# EAGLE board headstage-64-coax-adapter_panel (EAGLE 8.3.2), part 1 of 2
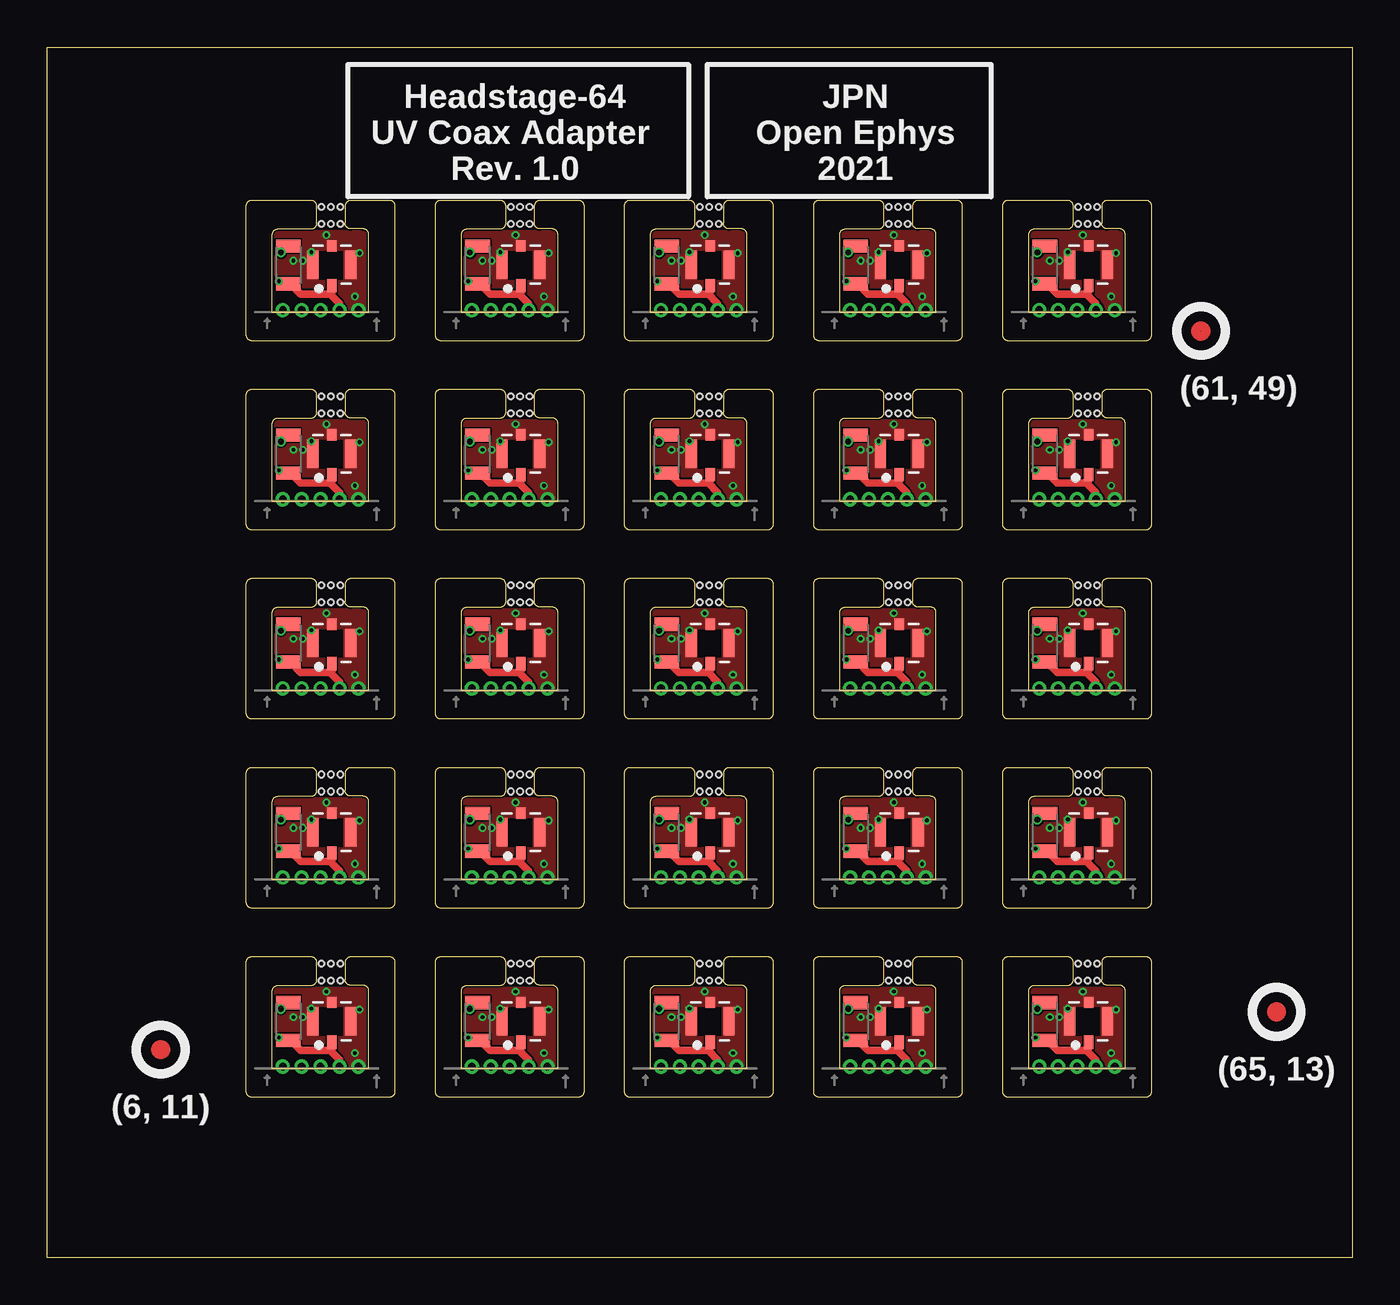
[diagram p0: board, top side]
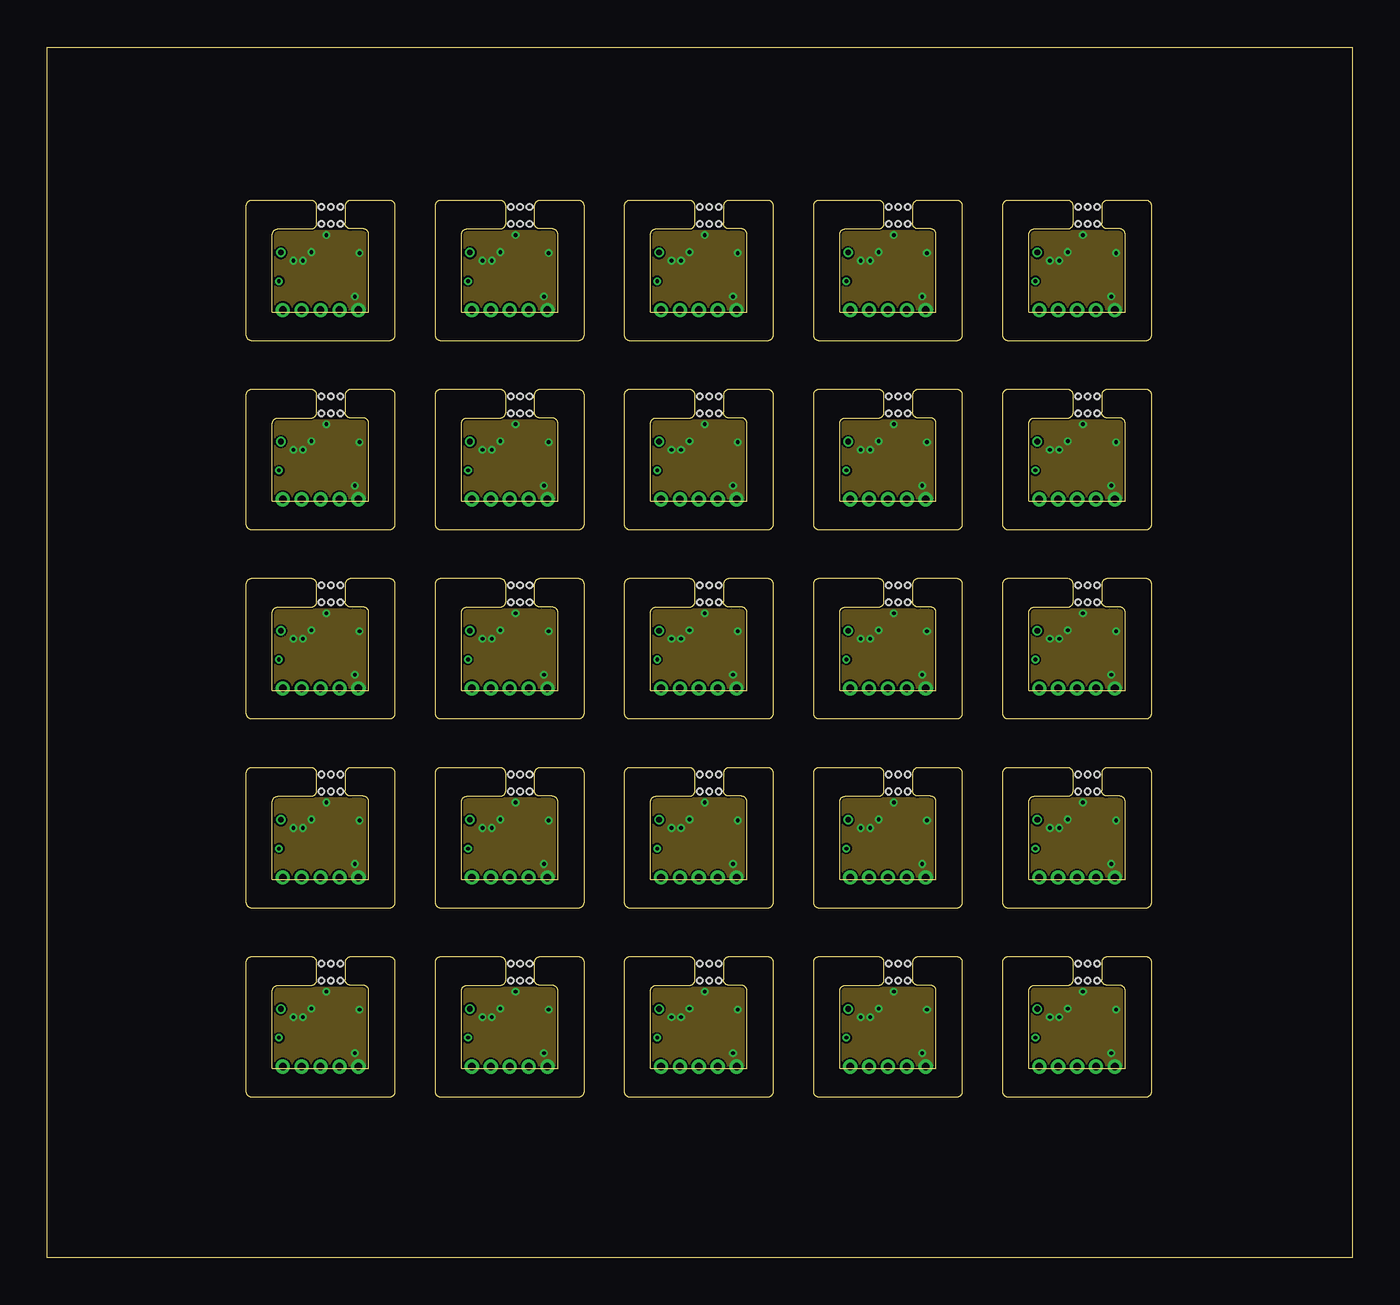
[diagram p1: board, inner layer Route2]
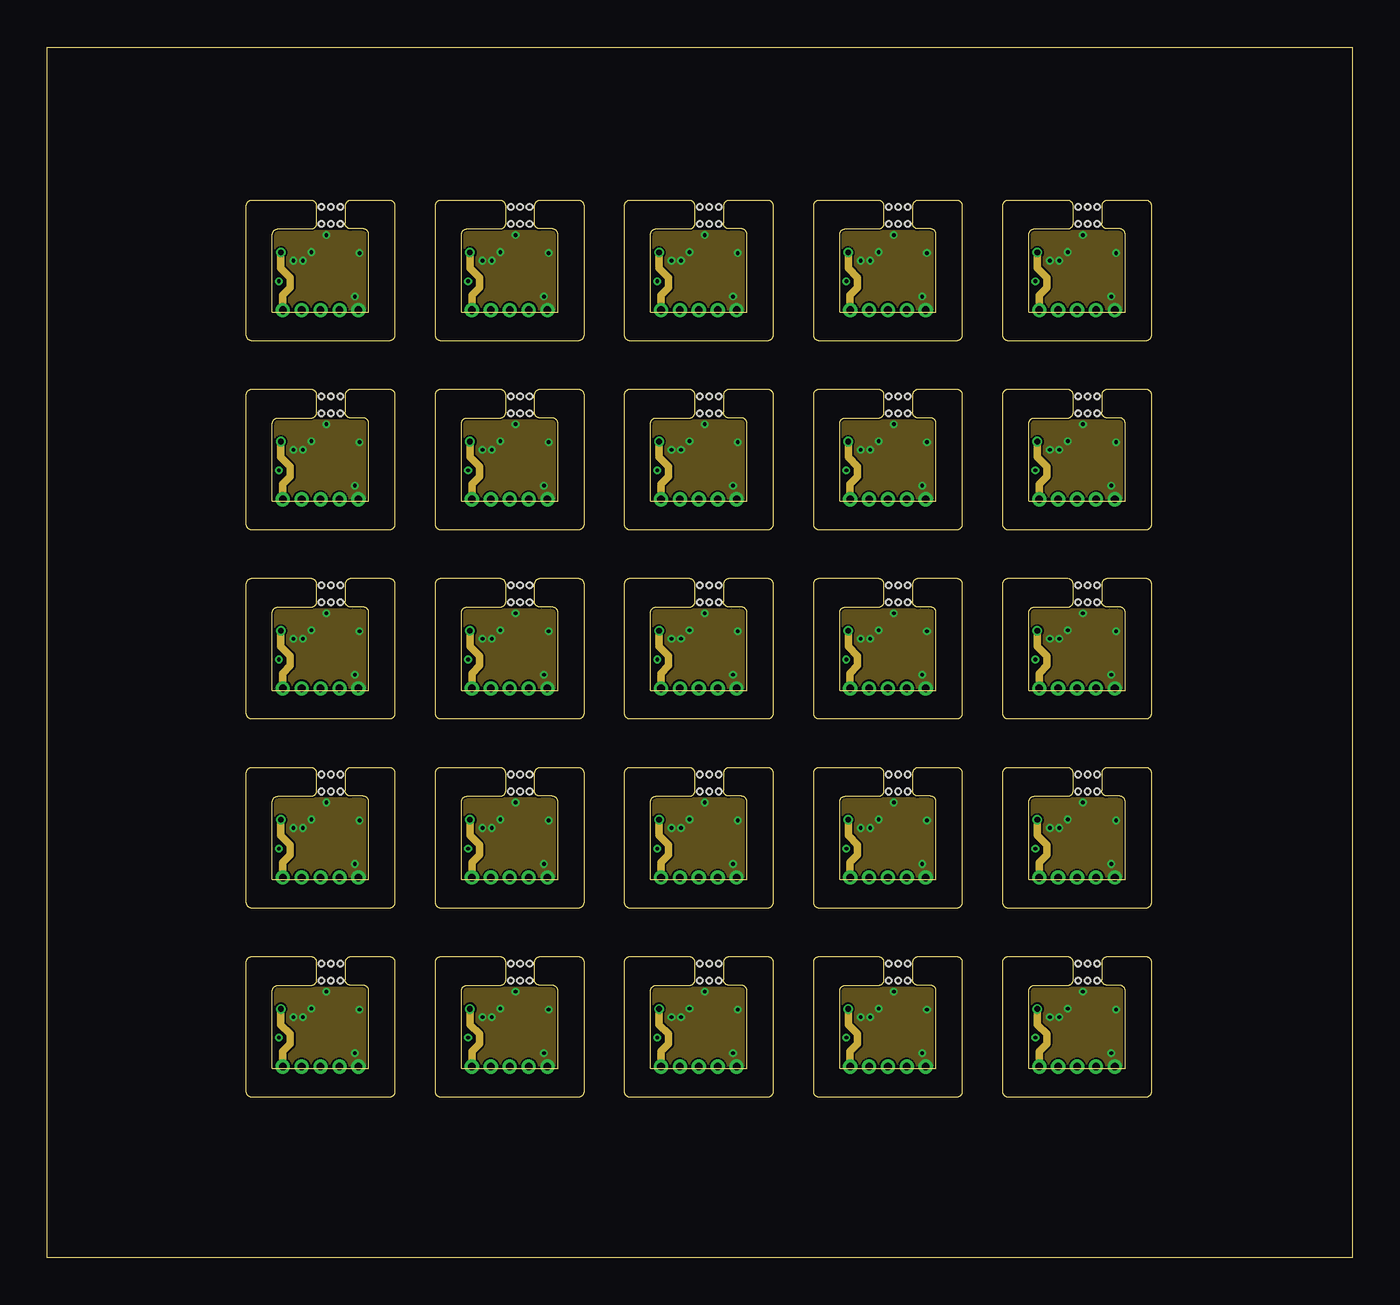
[diagram p2: board, inner layer Route15]
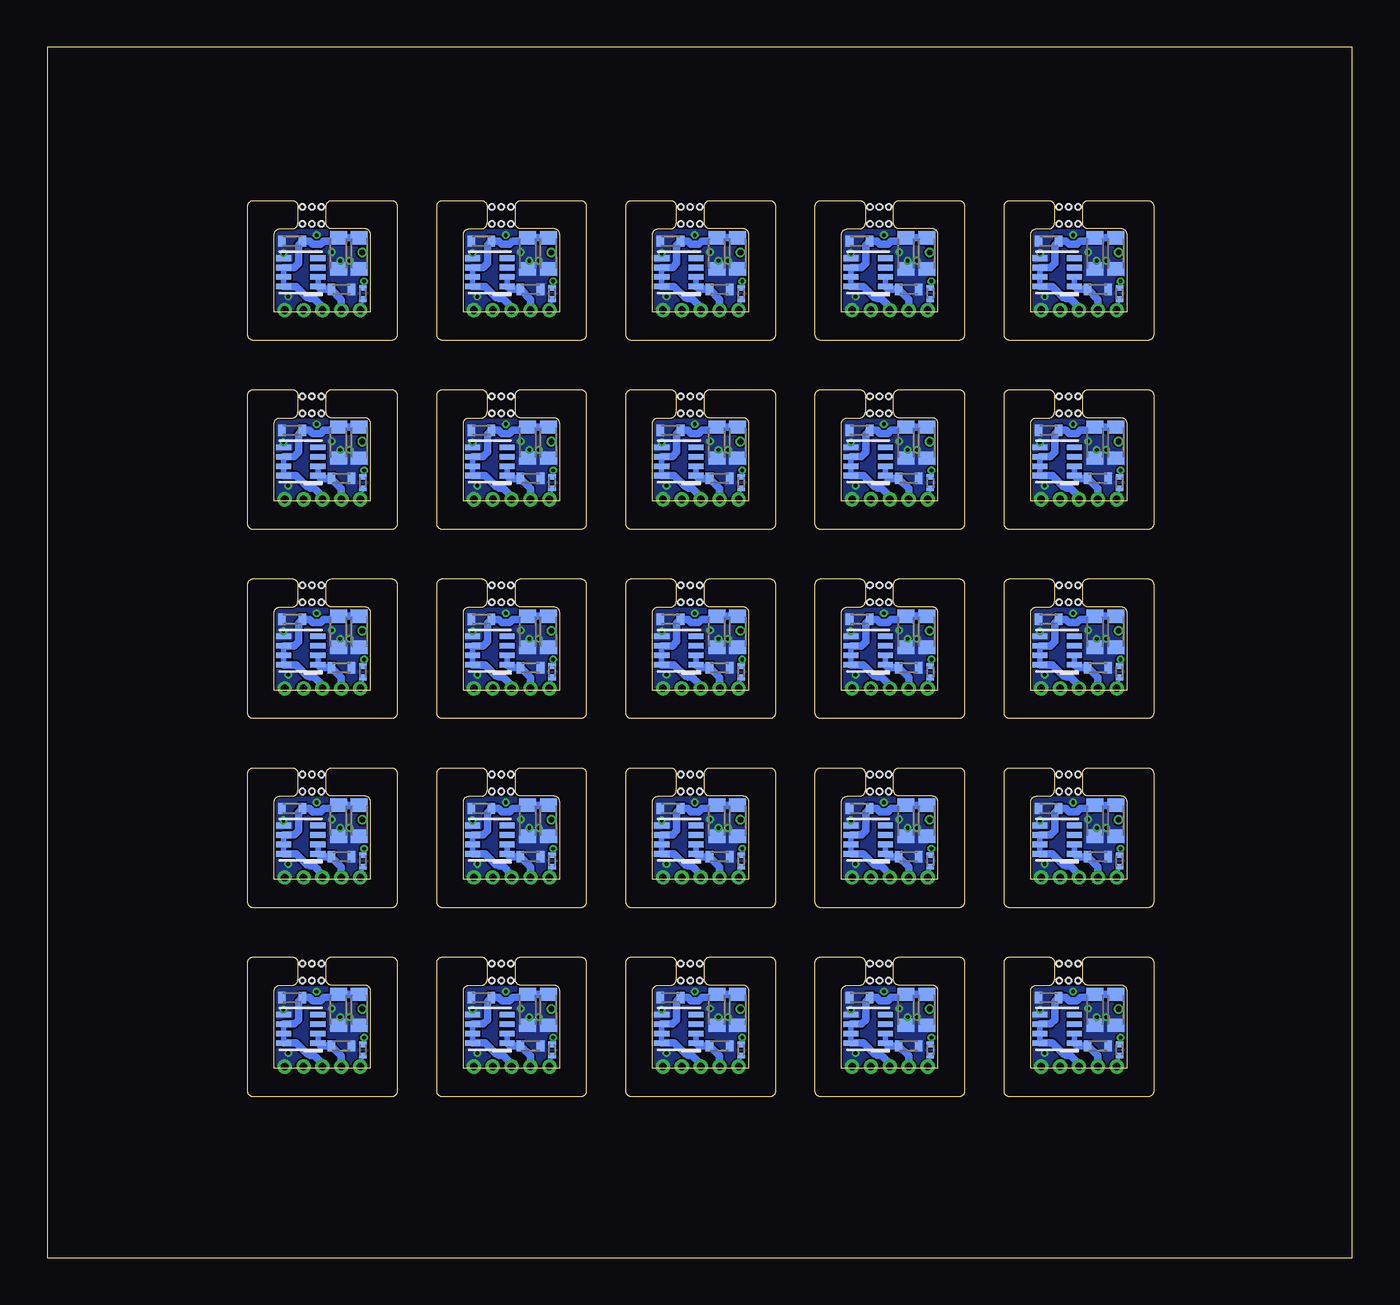
[diagram p3: board, bottom side, seen from below]

Size 69 x 64 mm. Coordinates in mm from the lower left corner, seen from the top.
Outline: 11.9,10 17,10 17,14.1 arc90 16.7,14.4 16.05,14.4 arc-90 15.75,14.7 15.75,15.6 arc-90 16.05,15.9 18.1,15.9 arc-90 18.4,15.6 18.4,8.8 arc-90 18.1,8.5 10.8,8.5 arc-90 10.5,8.8 10.5,15.6 arc-90 10.8,15.9 13.95,15.9 arc-90 14.25,15.6 14.25,14.7 arc-90 13.95,14.4 12.2,14.4 arc90 11.9,14.1 11.9,10
Outline: 0,0 0,64 69,64 69,0 0,0
Outline: 21.9,10 27,10 27,14.1 arc90 26.7,14.4 26.05,14.4 arc-90 25.75,14.7 25.75,15.6 arc-90 26.05,15.9 28.1,15.9 arc-90 28.4,15.6 28.4,8.8 arc-90 28.1,8.5 20.8,8.5 arc-90 20.5,8.8 20.5,15.6 arc-90 20.8,15.9 23.95,15.9 arc-90 24.25,15.6 24.25,14.7 arc-90 23.95,14.4 22.2,14.4 arc90 21.9,14.1 21.9,10
Outline: 31.9,10 37,10 37,14.1 arc90 36.7,14.4 36.05,14.4 arc-90 35.75,14.7 35.75,15.6 arc-90 36.05,15.9 38.1,15.9 arc-90 38.4,15.6 38.4,8.8 arc-90 38.1,8.5 30.8,8.5 arc-90 30.5,8.8 30.5,15.6 arc-90 30.8,15.9 33.95,15.9 arc-90 34.25,15.6 34.25,14.7 arc-90 33.95,14.4 32.2,14.4 arc90 31.9,14.1 31.9,10
Outline: 41.9,10 47,10 47,14.1 arc90 46.7,14.4 46.05,14.4 arc-90 45.75,14.7 45.75,15.6 arc-90 46.05,15.9 48.1,15.9 arc-90 48.4,15.6 48.4,8.8 arc-90 48.1,8.5 40.8,8.5 arc-90 40.5,8.8 40.5,15.6 arc-90 40.8,15.9 43.95,15.9 arc-90 44.25,15.6 44.25,14.7 arc-90 43.95,14.4 42.2,14.4 arc90 41.9,14.1 41.9,10
Outline: 51.9,10 57,10 57,14.1 arc90 56.7,14.4 56.05,14.4 arc-90 55.75,14.7 55.75,15.6 arc-90 56.05,15.9 58.1,15.9 arc-90 58.4,15.6 58.4,8.8 arc-90 58.1,8.5 50.8,8.5 arc-90 50.5,8.8 50.5,15.6 arc-90 50.8,15.9 53.95,15.9 arc-90 54.25,15.6 54.25,14.7 arc-90 53.95,14.4 52.2,14.4 arc90 51.9,14.1 51.9,10
Outline: 11.9,20 17,20 17,24.1 arc90 16.7,24.4 16.05,24.4 arc-90 15.75,24.7 15.75,25.6 arc-90 16.05,25.9 18.1,25.9 arc-90 18.4,25.6 18.4,18.8 arc-90 18.1,18.5 10.8,18.5 arc-90 10.5,18.8 10.5,25.6 arc-90 10.8,25.9 13.95,25.9 arc-90 14.25,25.6 14.25,24.7 arc-90 13.95,24.4 12.2,24.4 arc90 11.9,24.1 11.9,20
Outline: 21.9,20 27,20 27,24.1 arc90 26.7,24.4 26.05,24.4 arc-90 25.75,24.7 25.75,25.6 arc-90 26.05,25.9 28.1,25.9 arc-90 28.4,25.6 28.4,18.8 arc-90 28.1,18.5 20.8,18.5 arc-90 20.5,18.8 20.5,25.6 arc-90 20.8,25.9 23.95,25.9 arc-90 24.25,25.6 24.25,24.7 arc-90 23.95,24.4 22.2,24.4 arc90 21.9,24.1 21.9,20
Outline: 31.9,20 37,20 37,24.1 arc90 36.7,24.4 36.05,24.4 arc-90 35.75,24.7 35.75,25.6 arc-90 36.05,25.9 38.1,25.9 arc-90 38.4,25.6 38.4,18.8 arc-90 38.1,18.5 30.8,18.5 arc-90 30.5,18.8 30.5,25.6 arc-90 30.8,25.9 33.95,25.9 arc-90 34.25,25.6 34.25,24.7 arc-90 33.95,24.4 32.2,24.4 arc90 31.9,24.1 31.9,20
Outline: 41.9,20 47,20 47,24.1 arc90 46.7,24.4 46.05,24.4 arc-90 45.75,24.7 45.75,25.6 arc-90 46.05,25.9 48.1,25.9 arc-90 48.4,25.6 48.4,18.8 arc-90 48.1,18.5 40.8,18.5 arc-90 40.5,18.8 40.5,25.6 arc-90 40.8,25.9 43.95,25.9 arc-90 44.25,25.6 44.25,24.7 arc-90 43.95,24.4 42.2,24.4 arc90 41.9,24.1 41.9,20
Outline: 51.9,20 57,20 57,24.1 arc90 56.7,24.4 56.05,24.4 arc-90 55.75,24.7 55.75,25.6 arc-90 56.05,25.9 58.1,25.9 arc-90 58.4,25.6 58.4,18.8 arc-90 58.1,18.5 50.8,18.5 arc-90 50.5,18.8 50.5,25.6 arc-90 50.8,25.9 53.95,25.9 arc-90 54.25,25.6 54.25,24.7 arc-90 53.95,24.4 52.2,24.4 arc90 51.9,24.1 51.9,20
Outline: 11.9,30 17,30 17,34.1 arc90 16.7,34.4 16.05,34.4 arc-90 15.75,34.7 15.75,35.6 arc-90 16.05,35.9 18.1,35.9 arc-90 18.4,35.6 18.4,28.8 arc-90 18.1,28.5 10.8,28.5 arc-90 10.5,28.8 10.5,35.6 arc-90 10.8,35.9 13.95,35.9 arc-90 14.25,35.6 14.25,34.7 arc-90 13.95,34.4 12.2,34.4 arc90 11.9,34.1 11.9,30
Outline: 21.9,30 27,30 27,34.1 arc90 26.7,34.4 26.05,34.4 arc-90 25.75,34.7 25.75,35.6 arc-90 26.05,35.9 28.1,35.9 arc-90 28.4,35.6 28.4,28.8 arc-90 28.1,28.5 20.8,28.5 arc-90 20.5,28.8 20.5,35.6 arc-90 20.8,35.9 23.95,35.9 arc-90 24.25,35.6 24.25,34.7 arc-90 23.95,34.4 22.2,34.4 arc90 21.9,34.1 21.9,30
Outline: 31.9,30 37,30 37,34.1 arc90 36.7,34.4 36.05,34.4 arc-90 35.75,34.7 35.75,35.6 arc-90 36.05,35.9 38.1,35.9 arc-90 38.4,35.6 38.4,28.8 arc-90 38.1,28.5 30.8,28.5 arc-90 30.5,28.8 30.5,35.6 arc-90 30.8,35.9 33.95,35.9 arc-90 34.25,35.6 34.25,34.7 arc-90 33.95,34.4 32.2,34.4 arc90 31.9,34.1 31.9,30
Outline: 41.9,30 47,30 47,34.1 arc90 46.7,34.4 46.05,34.4 arc-90 45.75,34.7 45.75,35.6 arc-90 46.05,35.9 48.1,35.9 arc-90 48.4,35.6 48.4,28.8 arc-90 48.1,28.5 40.8,28.5 arc-90 40.5,28.8 40.5,35.6 arc-90 40.8,35.9 43.95,35.9 arc-90 44.25,35.6 44.25,34.7 arc-90 43.95,34.4 42.2,34.4 arc90 41.9,34.1 41.9,30
Outline: 51.9,30 57,30 57,34.1 arc90 56.7,34.4 56.05,34.4 arc-90 55.75,34.7 55.75,35.6 arc-90 56.05,35.9 58.1,35.9 arc-90 58.4,35.6 58.4,28.8 arc-90 58.1,28.5 50.8,28.5 arc-90 50.5,28.8 50.5,35.6 arc-90 50.8,35.9 53.95,35.9 arc-90 54.25,35.6 54.25,34.7 arc-90 53.95,34.4 52.2,34.4 arc90 51.9,34.1 51.9,30
Outline: 11.9,40 17,40 17,44.1 arc90 16.7,44.4 16.05,44.4 arc-90 15.75,44.7 15.75,45.6 arc-90 16.05,45.9 18.1,45.9 arc-90 18.4,45.6 18.4,38.8 arc-90 18.1,38.5 10.8,38.5 arc-90 10.5,38.8 10.5,45.6 arc-90 10.8,45.9 13.95,45.9 arc-90 14.25,45.6 14.25,44.7 arc-90 13.95,44.4 12.2,44.4 arc90 11.9,44.1 11.9,40
Outline: 21.9,40 27,40 27,44.1 arc90 26.7,44.4 26.05,44.4 arc-90 25.75,44.7 25.75,45.6 arc-90 26.05,45.9 28.1,45.9 arc-90 28.4,45.6 28.4,38.8 arc-90 28.1,38.5 20.8,38.5 arc-90 20.5,38.8 20.5,45.6 arc-90 20.8,45.9 23.95,45.9 arc-90 24.25,45.6 24.25,44.7 arc-90 23.95,44.4 22.2,44.4 arc90 21.9,44.1 21.9,40
Outline: 31.9,40 37,40 37,44.1 arc90 36.7,44.4 36.05,44.4 arc-90 35.75,44.7 35.75,45.6 arc-90 36.05,45.9 38.1,45.9 arc-90 38.4,45.6 38.4,38.8 arc-90 38.1,38.5 30.8,38.5 arc-90 30.5,38.8 30.5,45.6 arc-90 30.8,45.9 33.95,45.9 arc-90 34.25,45.6 34.25,44.7 arc-90 33.95,44.4 32.2,44.4 arc90 31.9,44.1 31.9,40
Outline: 41.9,40 47,40 47,44.1 arc90 46.7,44.4 46.05,44.4 arc-90 45.75,44.7 45.75,45.6 arc-90 46.05,45.9 48.1,45.9 arc-90 48.4,45.6 48.4,38.8 arc-90 48.1,38.5 40.8,38.5 arc-90 40.5,38.8 40.5,45.6 arc-90 40.8,45.9 43.95,45.9 arc-90 44.25,45.6 44.25,44.7 arc-90 43.95,44.4 42.2,44.4 arc90 41.9,44.1 41.9,40
Outline: 51.9,40 57,40 57,44.1 arc90 56.7,44.4 56.05,44.4 arc-90 55.75,44.7 55.75,45.6 arc-90 56.05,45.9 58.1,45.9 arc-90 58.4,45.6 58.4,38.8 arc-90 58.1,38.5 50.8,38.5 arc-90 50.5,38.8 50.5,45.6 arc-90 50.8,45.9 53.95,45.9 arc-90 54.25,45.6 54.25,44.7 arc-90 53.95,44.4 52.2,44.4 arc90 51.9,44.1 51.9,40
Outline: 11.9,50 17,50 17,54.1 arc90 16.7,54.4 16.05,54.4 arc-90 15.75,54.7 15.75,55.6 arc-90 16.05,55.9 18.1,55.9 arc-90 18.4,55.6 18.4,48.8 arc-90 18.1,48.5 10.8,48.5 arc-90 10.5,48.8 10.5,55.6 arc-90 10.8,55.9 13.95,55.9 arc-90 14.25,55.6 14.25,54.7 arc-90 13.95,54.4 12.2,54.4 arc90 11.9,54.1 11.9,50
Outline: 21.9,50 27,50 27,54.1 arc90 26.7,54.4 26.05,54.4 arc-90 25.75,54.7 25.75,55.6 arc-90 26.05,55.9 28.1,55.9 arc-90 28.4,55.6 28.4,48.8 arc-90 28.1,48.5 20.8,48.5 arc-90 20.5,48.8 20.5,55.6 arc-90 20.8,55.9 23.95,55.9 arc-90 24.25,55.6 24.25,54.7 arc-90 23.95,54.4 22.2,54.4 arc90 21.9,54.1 21.9,50
Outline: 31.9,50 37,50 37,54.1 arc90 36.7,54.4 36.05,54.4 arc-90 35.75,54.7 35.75,55.6 arc-90 36.05,55.9 38.1,55.9 arc-90 38.4,55.6 38.4,48.8 arc-90 38.1,48.5 30.8,48.5 arc-90 30.5,48.8 30.5,55.6 arc-90 30.8,55.9 33.95,55.9 arc-90 34.25,55.6 34.25,54.7 arc-90 33.95,54.4 32.2,54.4 arc90 31.9,54.1 31.9,50
Outline: 41.9,50 47,50 47,54.1 arc90 46.7,54.4 46.05,54.4 arc-90 45.75,54.7 45.75,55.6 arc-90 46.05,55.9 48.1,55.9 arc-90 48.4,55.6 48.4,48.8 arc-90 48.1,48.5 40.8,48.5 arc-90 40.5,48.8 40.5,55.6 arc-90 40.8,55.9 43.95,55.9 arc-90 44.25,55.6 44.25,54.7 arc-90 43.95,54.4 42.2,54.4 arc90 41.9,54.1 41.9,50
Outline: 51.9,50 57,50 57,54.1 arc90 56.7,54.4 56.05,54.4 arc-90 55.75,54.7 55.75,55.6 arc-90 56.05,55.9 58.1,55.9 arc-90 58.4,55.6 58.4,48.8 arc-90 58.1,48.5 50.8,48.5 arc-90 50.5,48.8 50.5,55.6 arc-90 50.8,55.9 53.95,55.9 arc-90 54.25,55.6 54.25,54.7 arc-90 53.95,54.4 52.2,54.4 arc90 51.9,54.1 51.9,50
Copper layers (1+2*15+16): Top 0.035mm / dielectric 0.2mm / Route2 0.0175mm / dielectric 1.065mm / Route15 0.0175mm / dielectric 0.2mm / Bottom 0.035mm
Design rules "jlcpcb-4-layer_JLC7628-stackup *": minimum track width 3.5mil, minimum drill 0.2mm, track to track 3.5mil, track to pad 3.5mil, pad to pad 3.5mil, via to via 3.5mil, smd to smd 0mil, copper to edge 0.1mm, drill to drill 3.5mil, minimum pad ring 4mil, minimum via ring 4mil, stop-mask expansion 1mil, vias tented up to drill 100mil, thermal gap 10mil
Holes 0.3 mm at 15,15.55 15,14.65 15.5,14.65 14.5,14.65 15.5,15.55 14.5,15.55 25,15.55 25,14.65 25.5,14.65 24.5,14.65 25.5,15.55 24.5,15.55 35,15.55 35,14.65 35.5,14.65 34.5,14.65 35.5,15.55 34.5,15.55 45,15.55 45,14.65 45.5,14.65 44.5,14.65 45.5,15.55 44.5,15.55 55,15.55 55,14.65 55.5,14.65 54.5,14.65 55.5,15.55 54.5,15.55 15,25.55 15,24.65 15.5,24.65 14.5,24.65 15.5,25.55 14.5,25.55 25,25.55 25,24.65 25.5,24.65 24.5,24.65 25.5,25.55 24.5,25.55 35,25.55 35,24.65 35.5,24.65 34.5,24.65 35.5,25.55 34.5,25.55 45,25.55 45,24.65 45.5,24.65 44.5,24.65 45.5,25.55 44.5,25.55 55,25.55 55,24.65 55.5,24.65 54.5,24.65 55.5,25.55 54.5,25.55 15,35.55 15,34.65 15.5,34.65 14.5,34.65 15.5,35.55 14.5,35.55 25,35.55 25,34.65 25.5,34.65 24.5,34.65 25.5,35.55 24.5,35.55 35,35.55 35,34.65 35.5,34.65 34.5,34.65 35.5,35.55 34.5,35.55 45,35.55 45,34.65 45.5,34.65 44.5,34.65 45.5,35.55 44.5,35.55 55,35.55 55,34.65 55.5,34.65 54.5,34.65 55.5,35.55 54.5,35.55 15,45.55 15,44.65 15.5,44.65 14.5,44.65 15.5,45.55 14.5,45.55 25,45.55 25,44.65 25.5,44.65 24.5,44.65 25.5,45.55 24.5,45.55 35,45.55 35,44.65 35.5,44.65 34.5,44.65 35.5,45.55 34.5,45.55 45,45.55 45,44.65 45.5,44.65 44.5,44.65 45.5,45.55 44.5,45.55 55,45.55 55,44.65 55.5,44.65 54.5,44.65 55.5,45.55 54.5,45.55 15,55.55 15,54.65 15.5,54.65 14.5,54.65 15.5,55.55 14.5,55.55 25,55.55 25,54.65 25.5,54.65 24.5,54.65 25.5,55.55 24.5,55.55 35,55.55 35,54.65 35.5,54.65 34.5,54.65 35.5,55.55 34.5,55.55 45,55.55 45,54.65 45.5,54.65 44.5,54.65 45.5,55.55 44.5,55.55 55,55.55 55,54.65 55.5,54.65 54.5,54.65 55.5,55.55 54.5,55.55

## Footprints (pad centres in the part's own frame; a part is rotated, then mirrored left to right if it is on the bottom)
0402T = smd 0.4 x 0.6: 1 -0.533,0; 2 0.533,0
0603T = smd 0.7 x 0.9: 1 -0.82,0; 2 0.82,0
X_FL_R_SMT_1(02) = smd 0.5 x 0.7: P$1 0,-1.1 | smd 0.6 x 1.5: P$2 -1,0; P$4 1,0 | smd 0.5 x 0.6: P$3 0,1
HEADSTAGE-64-REV1.4-DAUGHTER-CARD-CASTELLATED = drill 0.4 pad 0.75: 1 -2.55,0.1; 2 -1.55,0.1; 3 -0.55,0.1; 4 0.45,0.1; 5 1.45,0.1
0805T = smd 0.7 x 1.3: 1 -1,0; 2 1,0
0201T = smd 0.3 x 0.4: 1 -0.3,0; 2 0.3,0
UDFN8-2X2 = smd 0.8 x 0.3: 1 -0.91,0.75; 2 -0.91,0.25; 3 -0.91,-0.25; 4 -0.91,-0.75; 5 0.91,-0.75; 6 0.91,-0.25; 7 0.91,0.25; 8 0.91,0.75

## Placement (x,y rotation side)
C1  1uF  [0402T]  13.45,11.2 0 bottom
C2  10uF  [0402T]  16.05,13.75 180 bottom
C3  10uF  [0603T]  12.5,13.1 270 bottom
C4  10uF  [0603T]  13.6,13.1 270 bottom
C5  10uF  [0402T]  26.05,13.75 180 bottom
C6  1uF  [0402T]  23.45,11.2 0 bottom
C7  10uF  [0603T]  22.5,13.1 270 bottom
C8  10uF  [0603T]  23.6,13.1 270 bottom
C9  10uF  [0402T]  36.05,13.75 180 bottom
C10  1uF  [0402T]  33.45,11.2 0 bottom
C11  10uF  [0603T]  32.5,13.1 270 bottom
C12  10uF  [0603T]  33.6,13.1 270 bottom
C13  10uF  [0402T]  46.05,13.75 180 bottom
C14  1uF  [0402T]  43.45,11.2 0 bottom
C15  10uF  [0603T]  42.5,13.1 270 bottom
C16  10uF  [0603T]  43.6,13.1 270 bottom
C17  10uF  [0402T]  56.05,13.75 180 bottom
C18  1uF  [0402T]  53.45,11.2 0 bottom
C19  10uF  [0603T]  52.5,13.1 270 bottom
C20  10uF  [0603T]  53.6,13.1 270 bottom
C21  10uF  [0402T]  16.05,23.75 180 bottom
C22  1uF  [0402T]  13.45,21.2 0 bottom
C23  10uF  [0603T]  12.5,23.1 270 bottom
C24  10uF  [0603T]  13.6,23.1 270 bottom
C25  10uF  [0402T]  26.05,23.75 180 bottom
C26  1uF  [0402T]  23.45,21.2 0 bottom
C27  10uF  [0603T]  22.5,23.1 270 bottom
C28  10uF  [0603T]  23.6,23.1 270 bottom
C29  10uF  [0402T]  36.05,23.75 180 bottom
C30  1uF  [0402T]  33.45,21.2 0 bottom
C31  10uF  [0603T]  32.5,23.1 270 bottom
C32  10uF  [0603T]  33.6,23.1 270 bottom
C33  10uF  [0402T]  46.05,23.75 180 bottom
C34  1uF  [0402T]  43.45,21.2 0 bottom
C35  10uF  [0603T]  42.5,23.1 270 bottom
C36  10uF  [0603T]  43.6,23.1 270 bottom
C37  10uF  [0402T]  56.05,23.75 180 bottom
C38  1uF  [0402T]  53.45,21.2 0 bottom
C39  10uF  [0603T]  52.5,23.1 270 bottom
C40  10uF  [0603T]  53.6,23.1 270 bottom
C41  10uF  [0402T]  16.05,33.75 180 bottom
C42  1uF  [0402T]  13.45,31.2 0 bottom
C43  10uF  [0603T]  12.5,33.1 270 bottom
C44  10uF  [0603T]  13.6,33.1 270 bottom
C45  10uF  [0402T]  26.05,33.75 180 bottom
C46  1uF  [0402T]  23.45,31.2 0 bottom
C47  10uF  [0603T]  22.5,33.1 270 bottom
C48  10uF  [0603T]  23.6,33.1 270 bottom
C49  10uF  [0402T]  36.05,33.75 180 bottom
C50  1uF  [0402T]  33.45,31.2 0 bottom
C51  10uF  [0603T]  32.5,33.1 270 bottom
C52  10uF  [0603T]  33.6,33.1 270 bottom
C53  10uF  [0402T]  46.05,33.75 180 bottom
C54  1uF  [0402T]  43.45,31.2 0 bottom
C55  10uF  [0603T]  42.5,33.1 270 bottom
C56  10uF  [0603T]  43.6,33.1 270 bottom
C57  10uF  [0402T]  56.05,33.75 180 bottom
C58  1uF  [0402T]  53.45,31.2 0 bottom
C59  10uF  [0603T]  52.5,33.1 270 bottom
C60  10uF  [0603T]  53.6,33.1 270 bottom
C61  10uF  [0402T]  16.05,43.75 180 bottom
C62  1uF  [0402T]  13.45,41.2 0 bottom
C63  10uF  [0603T]  12.5,43.1 270 bottom
C64  10uF  [0603T]  13.6,43.1 270 bottom
C65  10uF  [0402T]  26.05,43.75 180 bottom
C66  1uF  [0402T]  23.45,41.2 0 bottom
C67  10uF  [0603T]  22.5,43.1 270 bottom
C68  10uF  [0603T]  23.6,43.1 270 bottom
C69  10uF  [0402T]  36.05,43.75 180 bottom
C70  1uF  [0402T]  33.45,41.2 0 bottom
C71  10uF  [0603T]  32.5,43.1 270 bottom
C72  10uF  [0603T]  33.6,43.1 270 bottom
C73  10uF  [0402T]  46.05,43.75 180 bottom
C74  1uF  [0402T]  43.45,41.2 0 bottom
C75  10uF  [0603T]  42.5,43.1 270 bottom
C76  10uF  [0603T]  43.6,43.1 270 bottom
C77  10uF  [0402T]  56.05,43.75 180 bottom
C78  1uF  [0402T]  53.45,41.2 0 bottom
C79  10uF  [0603T]  52.5,43.1 270 bottom
C80  10uF  [0603T]  53.6,43.1 270 bottom
C81  10uF  [0402T]  16.05,53.75 180 bottom
C82  1uF  [0402T]  13.45,51.2 0 bottom
C83  10uF  [0603T]  12.5,53.1 270 bottom
C84  10uF  [0603T]  13.6,53.1 270 bottom
C85  10uF  [0402T]  26.05,53.75 180 bottom
C86  1uF  [0402T]  23.45,51.2 0 bottom
C87  10uF  [0603T]  22.5,53.1 270 bottom
C88  10uF  [0603T]  23.6,53.1 270 bottom
C89  10uF  [0402T]  36.05,53.75 180 bottom
C90  1uF  [0402T]  33.45,51.2 0 bottom
C91  10uF  [0603T]  32.5,53.1 270 bottom
C92  10uF  [0603T]  33.6,53.1 270 bottom
C93  10uF  [0402T]  46.05,53.75 180 bottom
C94  1uF  [0402T]  43.45,51.2 0 bottom
C95  10uF  [0603T]  42.5,53.1 270 bottom
C96  10uF  [0603T]  43.6,53.1 270 bottom
C97  10uF  [0402T]  56.05,53.75 180 bottom
C98  1uF  [0402T]  53.45,51.2 0 bottom
C99  10uF  [0603T]  52.5,53.1 270 bottom
C100  10uF  [0603T]  53.6,53.1 270 bottom
E$1  [FIDUCIAL]  65,13 0 top
E$2  [FIDUCIAL]  61,49 0 top
E$4  [FIDUCIAL]  6,11 0 top
J1  X.FL-R-SMT-1(02)  [X_FL_R_SMT_1(02)]  15.05,12.5 0 top
J2  [HEADSTAGE-64-REV1.4-DAUGHTER-CARD-CASTELLATED]  15,10 0 top
J3  X.FL-R-SMT-1(02)  [X_FL_R_SMT_1(02)]  25.05,12.5 0 top
J4  [HEADSTAGE-64-REV1.4-DAUGHTER-CARD-CASTELLATED]  25,10 0 top
J5  X.FL-R-SMT-1(02)  [X_FL_R_SMT_1(02)]  35.05,12.5 0 top
J6  [HEADSTAGE-64-REV1.4-DAUGHTER-CARD-CASTELLATED]  35,10 0 top
J7  X.FL-R-SMT-1(02)  [X_FL_R_SMT_1(02)]  45.05,12.5 0 top
J8  [HEADSTAGE-64-REV1.4-DAUGHTER-CARD-CASTELLATED]  45,10 0 top
J9  X.FL-R-SMT-1(02)  [X_FL_R_SMT_1(02)]  55.05,12.5 0 top
J10  [HEADSTAGE-64-REV1.4-DAUGHTER-CARD-CASTELLATED]  55,10 0 top
J11  X.FL-R-SMT-1(02)  [X_FL_R_SMT_1(02)]  15.05,22.5 0 top
J12  [HEADSTAGE-64-REV1.4-DAUGHTER-CARD-CASTELLATED]  15,20 0 top
J13  X.FL-R-SMT-1(02)  [X_FL_R_SMT_1(02)]  25.05,22.5 0 top
J14  [HEADSTAGE-64-REV1.4-DAUGHTER-CARD-CASTELLATED]  25,20 0 top
J15  X.FL-R-SMT-1(02)  [X_FL_R_SMT_1(02)]  35.05,22.5 0 top
J16  [HEADSTAGE-64-REV1.4-DAUGHTER-CARD-CASTELLATED]  35,20 0 top
J17  X.FL-R-SMT-1(02)  [X_FL_R_SMT_1(02)]  45.05,22.5 0 top
J18  [HEADSTAGE-64-REV1.4-DAUGHTER-CARD-CASTELLATED]  45,20 0 top
J19  X.FL-R-SMT-1(02)  [X_FL_R_SMT_1(02)]  55.05,22.5 0 top
J20  [HEADSTAGE-64-REV1.4-DAUGHTER-CARD-CASTELLATED]  55,20 0 top
J21  X.FL-R-SMT-1(02)  [X_FL_R_SMT_1(02)]  15.05,32.5 0 top
J22  [HEADSTAGE-64-REV1.4-DAUGHTER-CARD-CASTELLATED]  15,30 0 top
J23  X.FL-R-SMT-1(02)  [X_FL_R_SMT_1(02)]  25.05,32.5 0 top
J24  [HEADSTAGE-64-REV1.4-DAUGHTER-CARD-CASTELLATED]  25,30 0 top
J25  X.FL-R-SMT-1(02)  [X_FL_R_SMT_1(02)]  35.05,32.5 0 top
J26  [HEADSTAGE-64-REV1.4-DAUGHTER-CARD-CASTELLATED]  35,30 0 top
J27  X.FL-R-SMT-1(02)  [X_FL_R_SMT_1(02)]  45.05,32.5 0 top
J28  [HEADSTAGE-64-REV1.4-DAUGHTER-CARD-CASTELLATED]  45,30 0 top
J29  X.FL-R-SMT-1(02)  [X_FL_R_SMT_1(02)]  55.05,32.5 0 top
J30  [HEADSTAGE-64-REV1.4-DAUGHTER-CARD-CASTELLATED]  55,30 0 top
J31  X.FL-R-SMT-1(02)  [X_FL_R_SMT_1(02)]  15.05,42.5 0 top
J32  [HEADSTAGE-64-REV1.4-DAUGHTER-CARD-CASTELLATED]  15,40 0 top
J33  X.FL-R-SMT-1(02)  [X_FL_R_SMT_1(02)]  25.05,42.5 0 top
J34  [HEADSTAGE-64-REV1.4-DAUGHTER-CARD-CASTELLATED]  25,40 0 top
J35  X.FL-R-SMT-1(02)  [X_FL_R_SMT_1(02)]  35.05,42.5 0 top
J36  [HEADSTAGE-64-REV1.4-DAUGHTER-CARD-CASTELLATED]  35,40 0 top
J37  X.FL-R-SMT-1(02)  [X_FL_R_SMT_1(02)]  45.05,42.5 0 top
J38  [HEADSTAGE-64-REV1.4-DAUGHTER-CARD-CASTELLATED]  45,40 0 top
J39  X.FL-R-SMT-1(02)  [X_FL_R_SMT_1(02)]  55.05,42.5 0 top
J40  [HEADSTAGE-64-REV1.4-DAUGHTER-CARD-CASTELLATED]  55,40 0 top
J41  X.FL-R-SMT-1(02)  [X_FL_R_SMT_1(02)]  15.05,52.5 0 top
J42  [HEADSTAGE-64-REV1.4-DAUGHTER-CARD-CASTELLATED]  15,50 0 top
J43  X.FL-R-SMT-1(02)  [X_FL_R_SMT_1(02)]  25.05,52.5 0 top
J44  [HEADSTAGE-64-REV1.4-DAUGHTER-CARD-CASTELLATED]  25,50 0 top
J45  X.FL-R-SMT-1(02)  [X_FL_R_SMT_1(02)]  35.05,52.5 0 top
J46  [HEADSTAGE-64-REV1.4-DAUGHTER-CARD-CASTELLATED]  35,50 0 top
J47  X.FL-R-SMT-1(02)  [X_FL_R_SMT_1(02)]  45.05,52.5 0 top
J48  [HEADSTAGE-64-REV1.4-DAUGHTER-CARD-CASTELLATED]  45,50 0 top
J49  X.FL-R-SMT-1(02)  [X_FL_R_SMT_1(02)]  55.05,52.5 0 top
J50  [HEADSTAGE-64-REV1.4-DAUGHTER-CARD-CASTELLATED]  55,50 0 top
L1  CIG21L4R7MNE  [0805T]  12.75,12.49 90 top
L2  CIG21L4R7MNE  [0805T]  22.75,12.49 90 top
L3  CIG21L4R7MNE  [0805T]  32.75,12.49 90 top
L4  CIG21L4R7MNE  [0805T]  42.75,12.49 90 top
L5  CIG21L4R7MNE  [0805T]  52.75,12.49 90 top
L6  CIG21L4R7MNE  [0805T]  12.75,22.49 90 top
L7  CIG21L4R7MNE  [0805T]  22.75,22.49 90 top
L8  CIG21L4R7MNE  [0805T]  32.75,22.49 90 top
L9  CIG21L4R7MNE  [0805T]  42.75,22.49 90 top
L10  CIG21L4R7MNE  [0805T]  52.75,22.49 90 top
L11  CIG21L4R7MNE  [0805T]  12.75,32.49 90 top
L12  CIG21L4R7MNE  [0805T]  22.75,32.49 90 top
L13  CIG21L4R7MNE  [0805T]  32.75,32.49 90 top
L14  CIG21L4R7MNE  [0805T]  42.75,32.49 90 top
L15  CIG21L4R7MNE  [0805T]  52.75,32.49 90 top
L16  CIG21L4R7MNE  [0805T]  12.75,42.49 90 top
L17  CIG21L4R7MNE  [0805T]  22.75,42.49 90 top
L18  CIG21L4R7MNE  [0805T]  32.75,42.49 90 top
L19  CIG21L4R7MNE  [0805T]  42.75,42.49 90 top
L20  CIG21L4R7MNE  [0805T]  52.75,42.49 90 top
L21  CIG21L4R7MNE  [0805T]  12.75,52.49 90 top
L22  CIG21L4R7MNE  [0805T]  22.75,52.49 90 top
L23  CIG21L4R7MNE  [0805T]  32.75,52.49 90 top
L24  CIG21L4R7MNE  [0805T]  42.75,52.49 90 top
L25  CIG21L4R7MNE  [0805T]  52.75,52.49 90 top
R1  1k  [0201T]  12.31,10.98 270 bottom
R2  1k  [0201T]  22.31,10.98 270 bottom
R3  1k  [0201T]  32.31,10.98 270 bottom
R4  1k  [0201T]  42.31,10.98 270 bottom
R5  1k  [0201T]  52.31,10.98 270 bottom
R6  1k  [0201T]  12.31,20.98 270 bottom
R7  1k  [0201T]  22.31,20.98 270 bottom
R8  1k  [0201T]  32.31,20.98 270 bottom
R9  1k  [0201T]  42.31,20.98 270 bottom
R10  1k  [0201T]  52.31,20.98 270 bottom
R11  1k  [0201T]  12.31,30.98 270 bottom
R12  1k  [0201T]  22.31,30.98 270 bottom
R13  1k  [0201T]  32.31,30.98 270 bottom
R14  1k  [0201T]  42.31,30.98 270 bottom
R15  1k  [0201T]  52.31,30.98 270 bottom
R16  1k  [0201T]  12.31,40.98 270 bottom
R17  1k  [0201T]  22.31,40.98 270 bottom
R18  1k  [0201T]  32.31,40.98 270 bottom
R19  1k  [0201T]  42.31,40.98 270 bottom
R20  1k  [0201T]  52.31,40.98 270 bottom
R21  1k  [0201T]  12.31,50.98 270 bottom
R22  1k  [0201T]  22.31,50.98 270 bottom
R23  1k  [0201T]  32.31,50.98 270 bottom
R24  1k  [0201T]  42.31,50.98 270 bottom
R25  1k  [0201T]  52.31,50.98 270 bottom
U1  MAX4945AELA+T  [UDFN8-2X2]  25.6,12.1 180 bottom
U2  MAX4945AELA+T  [UDFN8-2X2]  15.6,12.1 180 bottom
U3  MAX4945AELA+T  [UDFN8-2X2]  35.6,12.1 180 bottom
U4  MAX4945AELA+T  [UDFN8-2X2]  45.6,12.1 180 bottom
U5  MAX4945AELA+T  [UDFN8-2X2]  55.6,12.1 180 bottom
U6  MAX4945AELA+T  [UDFN8-2X2]  15.6,22.1 180 bottom
U7  MAX4945AELA+T  [UDFN8-2X2]  25.6,22.1 180 bottom
U8  MAX4945AELA+T  [UDFN8-2X2]  35.6,22.1 180 bottom
U9  MAX4945AELA+T  [UDFN8-2X2]  45.6,22.1 180 bottom
U10  MAX4945AELA+T  [UDFN8-2X2]  55.6,22.1 180 bottom
U11  MAX4945AELA+T  [UDFN8-2X2]  15.6,32.1 180 bottom
U12  MAX4945AELA+T  [UDFN8-2X2]  25.6,32.1 180 bottom
U13  MAX4945AELA+T  [UDFN8-2X2]  35.6,32.1 180 bottom
U14  MAX4945AELA+T  [UDFN8-2X2]  45.6,32.1 180 bottom
U15  MAX4945AELA+T  [UDFN8-2X2]  55.6,32.1 180 bottom
U16  MAX4945AELA+T  [UDFN8-2X2]  15.6,42.1 180 bottom
U17  MAX4945AELA+T  [UDFN8-2X2]  25.6,42.1 180 bottom
U18  MAX4945AELA+T  [UDFN8-2X2]  35.6,42.1 180 bottom
U19  MAX4945AELA+T  [UDFN8-2X2]  45.6,42.1 180 bottom
U20  MAX4945AELA+T  [UDFN8-2X2]  55.6,42.1 180 bottom
U21  MAX4945AELA+T  [UDFN8-2X2]  15.6,52.1 180 bottom
U22  MAX4945AELA+T  [UDFN8-2X2]  25.6,52.1 180 bottom
U23  MAX4945AELA+T  [UDFN8-2X2]  35.6,52.1 180 bottom
U24  MAX4945AELA+T  [UDFN8-2X2]  45.6,52.1 180 bottom
U25  MAX4945AELA+T  [UDFN8-2X2]  55.6,52.1 180 bottom

## Library data of the parts
C1-C100 = jonnew; PARTNO: CL05A475MO5NUNC
E$1 E$2 E$4 = fiducial
J1-J50 L1-L25 R1-R25 U1-U25 = jonnew

## Nets
GND: C1.2 C2.2 C3.2 C4.2 J1.P$2 J1.P$3 J1.P$4 J2.5 U2.5
GND2: C5.2 C6.2 C7.2 C8.2 J3.P$2 J3.P$3 J3.P$4 J4.5 U1.5
GND10: C9.2 C10.2 C11.2 C12.2 J5.P$2 J5.P$3 J5.P$4 J6.5 U3.5
GND12: C13.2 C14.2 C15.2 C16.2 J7.P$2 J7.P$3 J7.P$4 J8.5 U4.5
GND14: C17.2 C18.2 C19.2 C20.2 J9.P$2 J9.P$3 J9.P$4 J10.5 U5.5
GND16: C21.2 C22.2 C23.2 C24.2 J11.P$2 J11.P$3 J11.P$4 J12.5 U6.5
GND18: C25.2 C26.2 C27.2 C28.2 J13.P$2 J13.P$3 J13.P$4 J14.5 U7.5
GND20: C29.2 C30.2 C31.2 C32.2 J15.P$2 J15.P$3 J15.P$4 J16.5 U8.5
GND22: C33.2 C34.2 C35.2 C36.2 J17.P$2 J17.P$3 J17.P$4 J18.5 U9.5
GND24: C37.2 C38.2 C39.2 C40.2 J19.P$2 J19.P$3 J19.P$4 J20.5 U10.5
GND26: C41.2 C42.2 C43.2 C44.2 J21.P$2 J21.P$3 J21.P$4 J22.5 U11.5
GND28: C45.2 C46.2 C47.2 C48.2 J23.P$2 J23.P$3 J23.P$4 J24.5 U12.5
GND30: C49.2 C50.2 C51.2 C52.2 J25.P$2 J25.P$3 J25.P$4 J26.5 U13.5
GND32: C53.2 C54.2 C55.2 C56.2 J27.P$2 J27.P$3 J27.P$4 J28.5 U14.5
GND34: C57.2 C58.2 C59.2 C60.2 J29.P$2 J29.P$3 J29.P$4 J30.5 U15.5
GND36: C61.2 C62.2 C63.2 C64.2 J31.P$2 J31.P$3 J31.P$4 J32.5 U16.5
GND38: C65.2 C66.2 C67.2 C68.2 J33.P$2 J33.P$3 J33.P$4 J34.5 U17.5
GND40: C69.2 C70.2 C71.2 C72.2 J35.P$2 J35.P$3 J35.P$4 J36.5 U18.5
GND42: C73.2 C74.2 C75.2 C76.2 J37.P$2 J37.P$3 J37.P$4 J38.5 U19.5
GND44: C77.2 C78.2 C79.2 C80.2 J39.P$2 J39.P$3 J39.P$4 J40.5 U20.5
GND45: C81.2 C82.2 C83.2 C84.2 J41.P$2 J41.P$3 J41.P$4 J42.5 U21.5
GND46: C85.2 C86.2 C87.2 C88.2 J43.P$2 J43.P$3 J43.P$4 J44.5 U22.5
GND47: C89.2 C90.2 C91.2 C92.2 J45.P$2 J45.P$3 J45.P$4 J46.5 U23.5
GND48: C93.2 C94.2 C95.2 C96.2 J47.P$2 J47.P$3 J47.P$4 J48.5 U24.5
GND49: C97.2 C98.2 C99.2 C100.2 J49.P$2 J49.P$3 J49.P$4 J50.5 U25.5
N$1: J4.1 L2.2 R2.2
N$2: J6.1 L3.2 R3.2
N$3: J8.1 L4.2 R4.2
N$4: J10.1 L5.2 R5.2
N$5: J12.1 L6.2 R6.2
N$6: J14.1 L7.2 R7.2
N$7: J16.1 L8.2 R8.2
N$8: J18.1 L9.2 R9.2
N$9: J20.1 L10.2 R10.2
N$10: J22.1 L11.2 R11.2
N$11: J24.1 L12.2 R12.2
N$12: J26.1 L13.2 R13.2
N$13: J28.1 L14.2 R14.2
N$14: J30.1 L15.2 R15.2
N$15: J32.1 L16.2 R16.2
N$16: J34.1 L17.2 R17.2
N$17: J36.1 L18.2 R18.2
N$18: J38.1 L19.2 R19.2
N$19: J40.1 L20.2 R20.2
N$20: J42.1 L21.2 R21.2
N$21: J44.1 L22.2 R22.2
N$22: J46.1 L23.2 R23.2
N$23: J48.1 L24.2 R24.2
N$24: J50.1 L25.2 R25.2
N$48: J2.1 L1.2 R1.2
SIGOUT: J1.P$1 J2.4 L1.1 R1.1
SIGOUT1: J3.P$1 J4.4 L2.1 R2.1
SIGOUT2: J5.P$1 J6.4 L3.1 R3.1
SIGOUT3: J7.P$1 J8.4 L4.1 R4.1
SIGOUT4: J9.P$1 J10.4 L5.1 R5.1
SIGOUT5: J11.P$1 J12.4 L6.1 R6.1
SIGOUT6: J13.P$1 J14.4 L7.1 R7.1
SIGOUT7: J15.P$1 J16.4 L8.1 R8.1
SIGOUT8: J17.P$1 J18.4 L9.1 R9.1
SIGOUT9: J19.P$1 J20.4 L10.1 R10.1
SIGOUT10: J21.P$1 J22.4 L11.1 R11.1
SIGOUT11: J23.P$1 J24.4 L12.1 R12.1
SIGOUT12: J25.P$1 J26.4 L13.1 R13.1
SIGOUT13: J27.P$1 J28.4 L14.1 R14.1
SIGOUT14: J29.P$1 J30.4 L15.1 R15.1
SIGOUT15: J31.P$1 J32.4 L16.1 R16.1
SIGOUT16: J33.P$1 J34.4 L17.1 R17.1
SIGOUT17: J35.P$1 J36.4 L18.1 R18.1
SIGOUT18: J37.P$1 J38.4 L19.1 R19.1
SIGOUT19: J39.P$1 J40.4 L20.1 R20.1
SIGOUT20: J41.P$1 J42.4 L21.1 R21.1
SIGOUT21: J43.P$1 J44.4 L22.1 R22.1
SIGOUT22: J45.P$1 J46.4 L23.1 R23.1
SIGOUT23: J47.P$1 J48.4 L24.1 R24.1
SIGOUT24: J49.P$1 J50.4 L25.1 R25.1
VCOAX: C2.1 C3.1 C4.1 J2.3 U2.6 U2.7 U2.8
VCOAX1: C5.1 C7.1 C8.1 J4.3 U1.6 U1.7 U1.8
VCOAX2: C9.1 C11.1 C12.1 J6.3 U3.6 U3.7 U3.8
VCOAX3: C13.1 C15.1 C16.1 J8.3 U4.6 U4.7 U4.8
VCOAX4: C17.1 C19.1 C20.1 J10.3 U5.6 U5.7 U5.8
VCOAX5: C21.1 C23.1 C24.1 J12.3 U6.6 U6.7 U6.8
VCOAX6: C25.1 C27.1 C28.1 J14.3 U7.6 U7.7 U7.8
VCOAX7: C29.1 C31.1 C32.1 J16.3 U8.6 U8.7 U8.8
VCOAX8: C33.1 C35.1 C36.1 J18.3 U9.6 U9.7 U9.8
VCOAX9: C37.1 C39.1 C40.1 J20.3 U10.6 U10.7 U10.8
VCOAX10: C41.1 C43.1 C44.1 J22.3 U11.6 U11.7 U11.8
VCOAX11: C45.1 C47.1 C48.1 J24.3 U12.6 U12.7 U12.8
VCOAX12: C49.1 C51.1 C52.1 J26.3 U13.6 U13.7 U13.8
VCOAX13: C53.1 C55.1 C56.1 J28.3 U14.6 U14.7 U14.8
VCOAX14: C57.1 C59.1 C60.1 J30.3 U15.6 U15.7 U15.8
VCOAX15: C61.1 C63.1 C64.1 J32.3 U16.6 U16.7 U16.8
VCOAX16: C65.1 C67.1 C68.1 J34.3 U17.6 U17.7 U17.8
VCOAX17: C69.1 C71.1 C72.1 J36.3 U18.6 U18.7 U18.8
VCOAX18: C73.1 C75.1 C76.1 J38.3 U19.6 U19.7 U19.8
VCOAX19: C77.1 C79.1 C80.1 J40.3 U20.6 U20.7 U20.8
VCOAX20: C81.1 C83.1 C84.1 J42.3 U21.6 U21.7 U21.8
VCOAX21: C85.1 C87.1 C88.1 J44.3 U22.6 U22.7 U22.8
VCOAX22: C89.1 C91.1 C92.1 J46.3 U23.6 U23.7 U23.8
VCOAX23: C93.1 C95.1 C96.1 J48.3 U24.6 U24.7 U24.8
VCOAX24: C97.1 C99.1 C100.1 J50.3 U25.6 U25.7 U25.8
VRAW: C1.1 J2.2 U2.1 U2.2
VRAW1: C6.1 J4.2 U1.1 U1.2
VRAW2: C10.1 J6.2 U3.1 U3.2
VRAW3: C14.1 J8.2 U4.1 U4.2
VRAW4: C18.1 J10.2 U5.1 U5.2
VRAW5: C22.1 J12.2 U6.1 U6.2
VRAW6: C26.1 J14.2 U7.1 U7.2
VRAW7: C30.1 J16.2 U8.1 U8.2
VRAW8: C34.1 J18.2 U9.1 U9.2
VRAW9: C38.1 J20.2 U10.1 U10.2
VRAW10: C42.1 J22.2 U11.1 U11.2
VRAW11: C46.1 J24.2 U12.1 U12.2
VRAW12: C50.1 J26.2 U13.1 U13.2
VRAW13: C54.1 J28.2 U14.1 U14.2
VRAW14: C58.1 J30.2 U15.1 U15.2
VRAW15: C62.1 J32.2 U16.1 U16.2
VRAW16: C66.1 J34.2 U17.1 U17.2
VRAW17: C70.1 J36.2 U18.1 U18.2
VRAW18: C74.1 J38.2 U19.1 U19.2
VRAW19: C78.1 J40.2 U20.1 U20.2
VRAW20: C82.1 J42.2 U21.1 U21.2
VRAW21: C86.1 J44.2 U22.1 U22.2
VRAW22: C90.1 J46.2 U23.1 U23.2
VRAW23: C94.1 J48.2 U24.1 U24.2
VRAW24: C98.1 J50.2 U25.1 U25.2